# Altium PCB RN2483A.PcbDoc
Units mm, origin at the board's own origin, x right, y up, seen from the top; angles counter-clockwise.
Board outline 30.5 x 38.8 mm, 2 copper layers (Top Layer, Bottom Layer); 7 components, 7 nets, 77 pads, 127 vias.
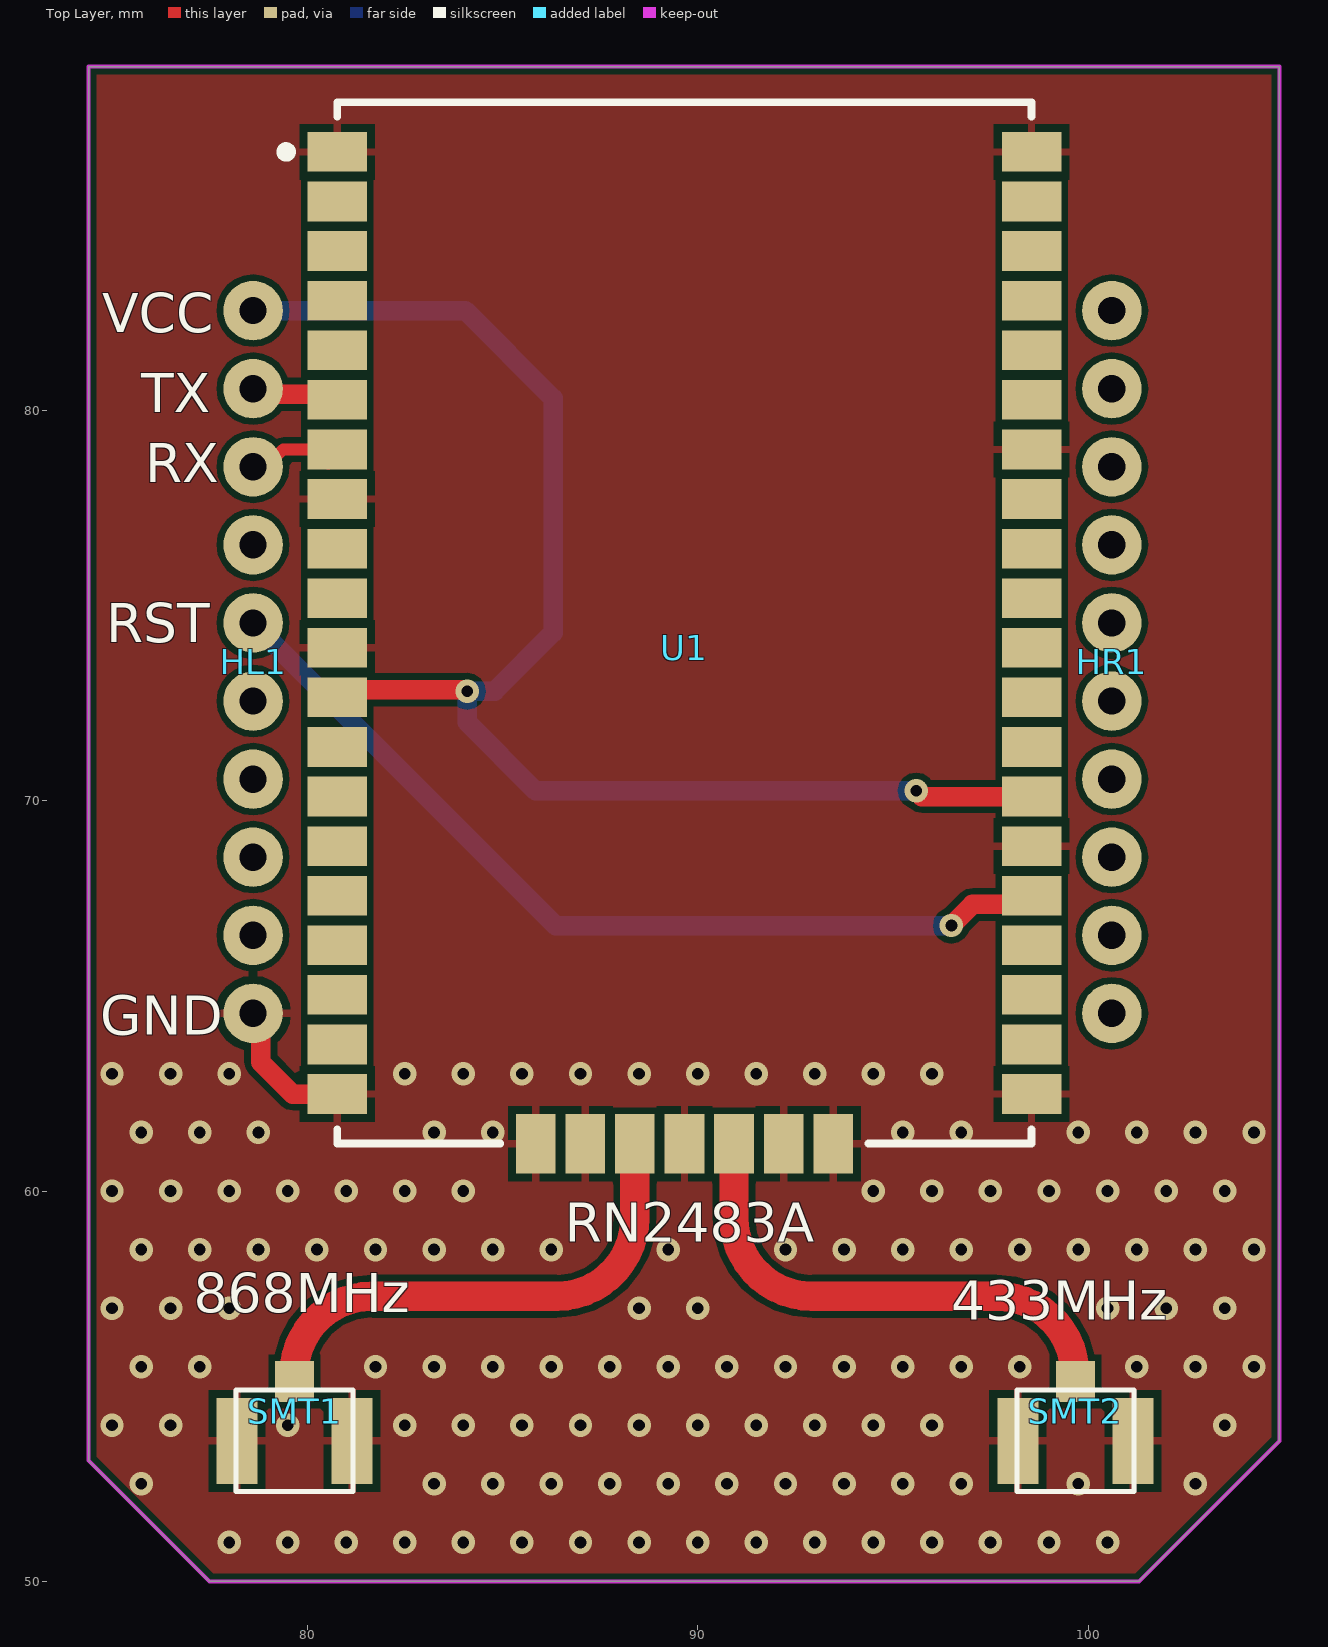
[diagram p0: Top Layer view]
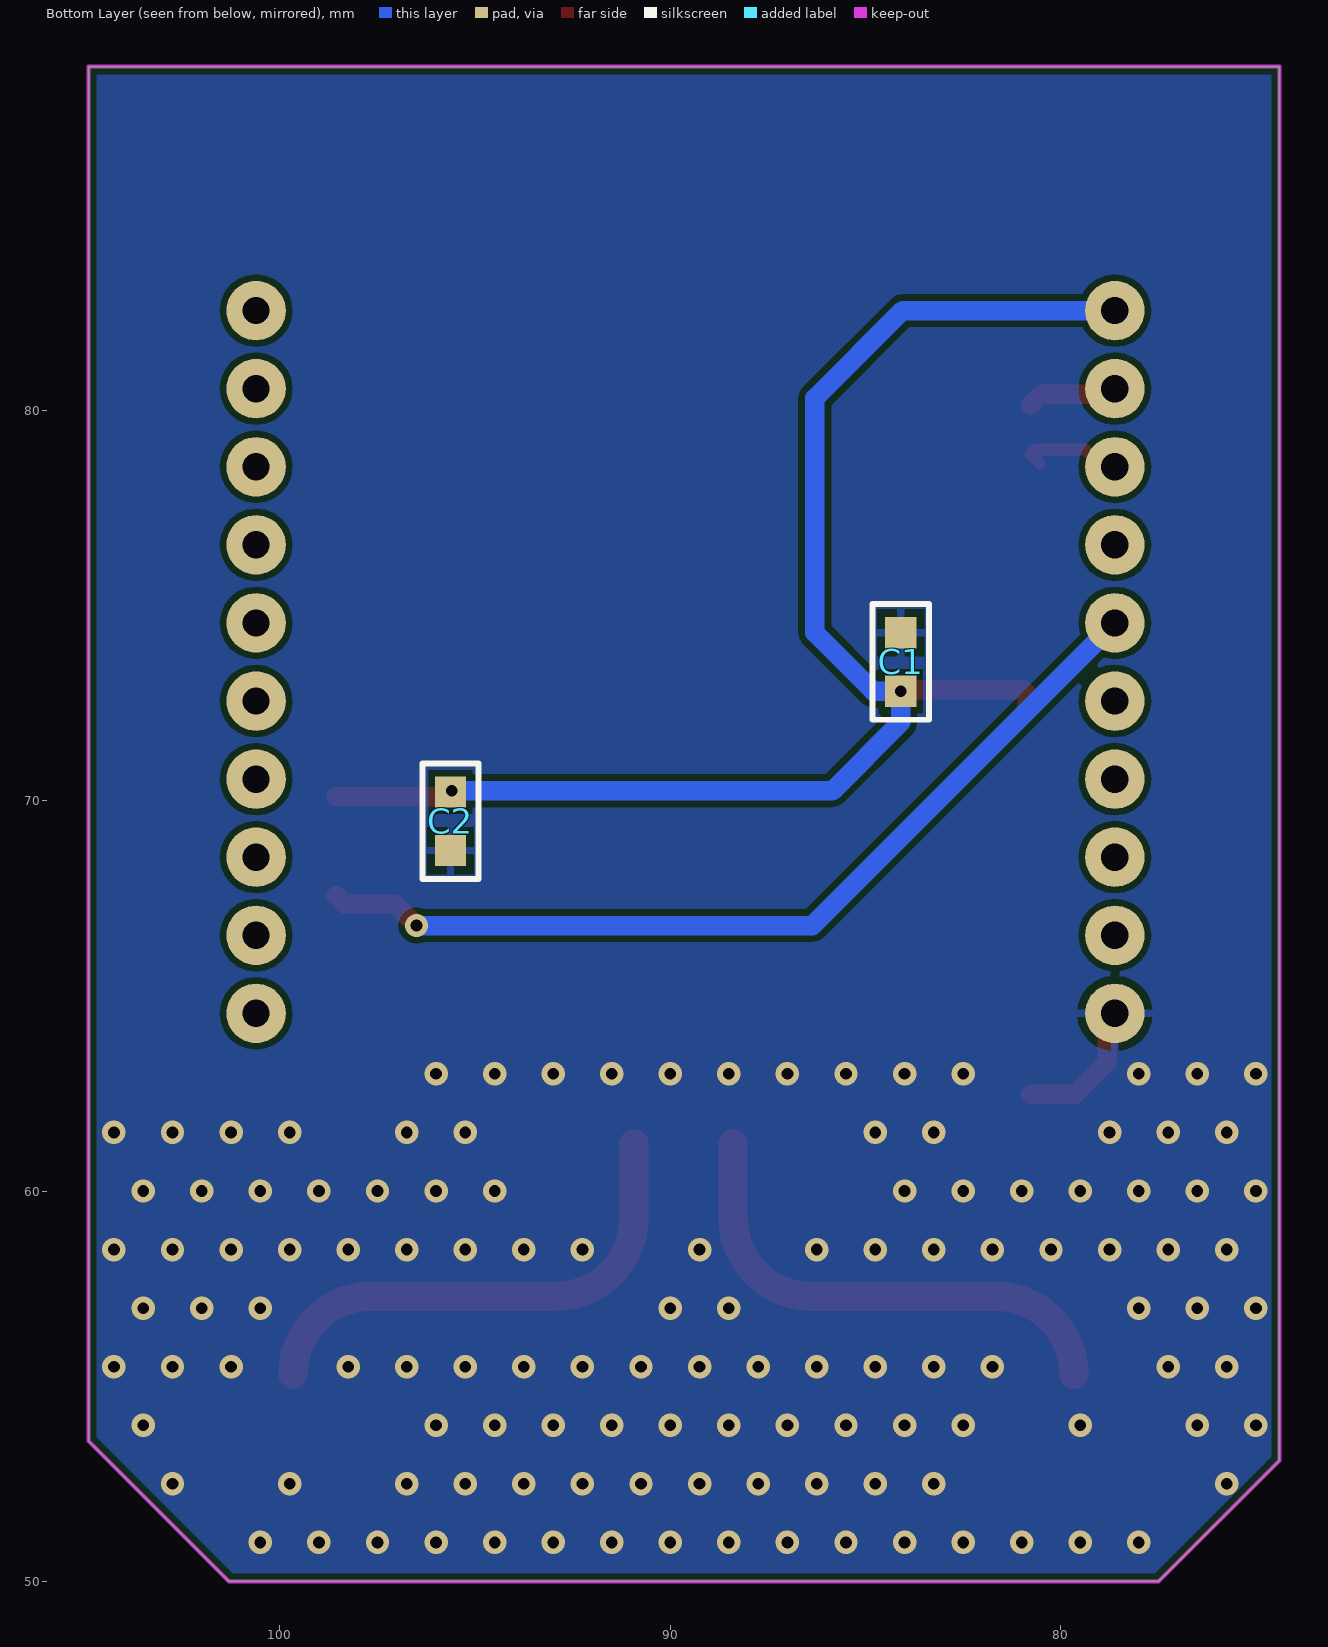
[diagram p1: Bottom Layer view, seen from below]

## Layer stack, top to bottom
Top Solder: solder mask 0.0102, Solder Resist, Dk 3.5
Top Layer: signal copper 0.0356
Dielectric 1: dielectric 0.32, FR-4, Dk 4.8
Bottom Layer: signal copper 0.0356
Bottom Solder: solder mask 0.0102, Solder Resist, Dk 3.5

## Board outline
74.4,53.1 77.5,50 101.3,50 104.9,53.6 104.9,88.8 74.4,88.8

## Design rules (kind name [scope] priority, off if disabled: settings)
Clearance [All] p1: gap=0.16 ignorepadtopadclearanceinfootprint=FALSE except(0: Arc-Text Arc-Hole Track-Text Track-Hole SMDPad-Text SMDPad-Hole THPad-Text THPad-Hole Via-Text Via-Hole Fill-Text Fill-Hole Poly-Text Poly-Hole Region-Text Region-Hole Text-Text Text-Hole)
DiffPairsRouting [All] p1: maxlimit=0.254 minlimit=0.254 mostfreqgap=0.254 toplayer_minwidth=0.16 toplayer_maxwidth=0.381 toplayer_prefwidth=0.2 bottomlayer_minwidth=0.16 bottomlayer_maxwidth=0.381 bottomlayer_prefwidth=0.2 maxuncoupledlength=12.7
Height [All] p1: minheight=0 maxheight=200 prefheight=12.7
HoleSize [All] p1: absolutevalues=TRUE maxlimit=6.35 minlimit=0.3 maxpercent=80.000 minpercent=20.000
MinimumSolderMaskSliver [All] p1: minsoldermaskwidth=0.1
PlaneClearance [All] p1: clearance=1
PlaneConnect [All] p1: planeconnectstyle=Relief reliefexpansion=0.508 reliefentries=4 reliefconductorwidth=1 reliefairgap=0.254
PolygonConnect PolygonConnect_1 [IsVia] p1: connectstyle=Direct reliefconductorwidth=0.254 reliefentries=4 polygonreliefangle="90 Angle" airgapwidth=0.254
PolygonConnect [All] p2: connectstyle=Relief reliefconductorwidth=0.2 reliefentries=4 polygonreliefangle="90 Angle" airgapwidth=0.2
RoutingVias [All] p1: holewidth=0.3 width=0.6 viastyle="Through Hole" minholewidth=0.3 minwidth=0.6 maxholewidth=6.35 maxwidth=10
SilkToSolderMaskClearance [IsPad] p1: minsilkscreentomaskgap=0.178 clearancetoexposedcopper=TRUE
SolderMaskExpansion [All] p1: expansion=0.102
Width [All] p1: maxlimit=5 minlimit=0.16 preferedwidth=0.25 minimp=50.000000 maximp=50.000000 favimp=50.000000
23 further rules are at their usual default settings.

## Components (designator, comment, footprint, x,y, rotation, side; value= is the part's Value field where it differs from the comment)
C1 "02016D104KAT2A" C0603 84.1,73.55 r270 bottom value=100nF
C2 "02016D104KAT2A" C0603 95.631,69.469 r90 bottom value=100nF
HL1 "Header1X10" HEADER1X10 78.613,82.55 r0 top
HR1 "Header1X10" HEADER1X10 100.609,82.55 r0 top
SMT1 "U.FL-R-SMT" *U.FL-R-SMT_U.FL-R-SMT(Primary) 79.675,53.6 r180 top
SMT2 "U.FL-R-SMT" *U.FL-R-SMT_U.FL-R-SMT(Primary) 99.675,53.6 r180 top
U1 "RN2483A-I/RM103" MCHP-MODULE-47_V 89.662,73.914 r0 top

## Footprints (in the part's own frame and the unit in brackets; to place one, negate y for a bottom-side part, rotate by r counter-clockwise, add the part's x,y. Pads: shape width x height; smd on the part's side, far side on the other; paste and mask are expansions set on the pad)
*U.FL-R-SMT_U.FL-R-SMT(Primary) [mm]
  rect 1x1.05 smd: P$1(0,-1.525)
  rect 1.05x2.2 smd: P$2(1.475,0) P$3(-1.475,0)
  silkscreen extent -1.5,-1.3 1.5,1.3
C0603 [mm]
  rect 0.8x0.8 smd: 1(-0.75,0) 2(0.75,0)
  silkscreen extent -1.48,-0.72 1.48,0.72, body extent -0.8,-0.4 0.8,0.4, height 0.8
HEADER1X10 [mil]
  round 60 hole 27.56: 1(0,0) 2(0,-78.74) 3(0,-157.48) 4(0,-236.22) 5(0,-314.96) 6(0,-393.7) 7(0,-472.44) 8(0,-551.18) 9(0,-629.92) 10(0,-708.66)
MCHP-MODULE-47_V [mil] "SMD, 47-Leads, Body 26.67x17.78mm, Pitch 1.27mm"
  rect 60x40 smd mask+7.87: 1(-350,500) 2(-350,450) 3(-350,400) 4(-350,350) 5(-350,300) 6(-350,250) 7(-350,200) 8(-350,150) 9(-350,100) 10(-350,50) 11(-350,0) 12(-350,-50) 13(-350,-100) 14(-350,-150) 15(-350,-200) 16(-350,-250) 17(-350,-300) 18(-350,-350) 19(-350,-400) 20(-350,-450) 28(350,-450) 29(350,-400) 30(350,-350) 31(350,-300) 32(350,-250) 33(350,-200) 34(350,-150) 35(350,-100) 36(350,-50) 37(350,0) 38(350,50) 39(350,100) 40(350,150) 41(350,200) 42(350,250) 43(350,300) 44(350,350) 45(350,400) 46(350,450) 47(350,500)
  rect 40x60 smd mask+7.87: 21(-150,-500) 22(-100,-500) 23(-50,-500) 24(0,-500) 25(50,-500) 26(100,-500) 27(150,-500)
  silkscreen extent -407,-500 350,550, body extent -350,-500 350,550, height 131

## Part data
C1 C2: "C0603"
SMT1 SMT2: Package=None, Availability=Unavailable, MF="Hirose Electric", MP=U.FL-R-SMT, Price=None, SnapEDA_Link=https://www.snapeda.com/parts/U.FL-R-SMT/Hirose%20Electric%20Co%20Ltd/view-part/?ref=snap
U1: library part CMP-2000-07478-1, "Low-Power Long Range LoRa(R) Technology Transceiver Module, 2.1 to 3.6 V, -40 to 85 degC, 47-Pin SMD, RoHS, Tray", Manufacturer=Microchip, Package Description="47-Pin Surface Mount Device, Body 26.67 x 17.78 mm, Pitch 1.27 mm", Package Reference=MODULE-47, Datasheet URL=http://www.microchip.com/mymicrochip/filehandler.aspx?ddocname=en574289, Datasheet Version="Rev. C, 04/2017", Manufacturer URL=http://www.microchip.com/, Mounting Technology=SurfaceMount, RoHSCompliant=false

## Via types
v1: diameter 0.6, hole 0.3, Top Layer to Bottom Layer, tented both sides, 127 vias

## Nets (pads, with @x,y where several pads share a name; then routed paths per layer and width w, separated by ;. In a path a pad name is that pad's centre, name@x,y a point inside that pad or via, vN(x,y) a via of type N, cw(c..) or ccw(c..) an arc to the next point about the centre after c; other vN are vias at no path point)
GND: C1.1 C2.1 HL1.10 SMT1.P$2 SMT1.P$3 SMT2.P$2 SMT2.P$3 U1.1 U1.8 U1.11 U1.20 U1.21 U1.22 U1.24 U1.26 U1.27 U1.28 U1.33 U1.41 U1.47 | length 3.6
  Top Layer w0.5: HL1.10 78.809,64.354 78.809,63.304 79.629,62.484 U1.20
  other v1: 78,51 79.5,51 81,51 82.5,51 84,51 85.5,51 87,51 88.5,51 90,51 91.5,51 93,51 94.5,51 96,51 97.5,51 99,51 100.5,51 75.75,52.5 83.25,52.5 84.75,52.5 86.25,52.5 87.75,52.5 89.25,52.5 90.75,52.5 92.25,52.5 93.75,52.5 95.25,52.5 96.75,52.5 99.75,52.5 102.75,52.5 75,54 76.5,54 79.5,54 82.5,54 84,54 85.5,54 87,54 88.5,54 90,54 91.5,54 93,54 94.5,54 96,54 103.5,54 75.75,55.5 77.25,55.5 81.75,55.5 83.25,55.5 84.75,55.5 86.25,55.5 87.75,55.5 89.25,55.5 90.75,55.5 92.25,55.5 93.75,55.5 95.25,55.5 96.75,55.5 98.25,55.5 101.25,55.5 102.75,55.5 104.25,55.5 75,57 76.5,57 78,57 88.5,57 90,57 100.5,57 102,57 103.5,57 75.75,58.5 77.25,58.5 78.75,58.5 80.25,58.5 81.75,58.5 83.25,58.5 84.75,58.5 86.25,58.5 89.25,58.5 92.25,58.5 93.75,58.5 95.25,58.5 96.75,58.5 98.25,58.5 99.75,58.5 101.25,58.5 102.75,58.5 104.25,58.5 75,60 76.5,60 78,60 79.5,60 81,60 82.5,60 84,60 94.5,60 96,60 97.5,60 99,60 100.5,60 102,60 103.5,60 75.75,61.5 77.25,61.5 78.75,61.5 83.25,61.5 84.75,61.5 95.25,61.5 96.75,61.5 99.75,61.5 101.25,61.5 102.75,61.5 104.25,61.5 75,63 76.5,63 78,63 82.5,63 84,63 85.5,63 87,63 88.5,63 90,63 91.5,63 93,63 94.5,63 96,63
R\E\S\E\T\: HL1.5 U1.32 | length 23.5
  Top Layer w0.5: v1(96.5,66.8) 97.04,67.34 98.328,67.34 U1.32
  Bottom Layer w0.5: HL1.5 86.363,66.8 v1(96.5,66.8)
RFH: SMT1.P$1 U1.23 | length 12.9
  Top Layer w0.75: SMT1.P$1@79.662,55.304 cw(c81.662,55.304) 81.662,57.304 86.392,57.304 ccw(c86.392,59.304) 88.392,59.304 U1.23
RFL: SMT2.P$1 U1.25 | length 12.9
  Top Layer w0.75: U1.25 90.932,59.304 ccw(c92.932,59.304) 92.932,57.304 97.662,57.304 cw(c97.662,55.304) SMT2.P$1@99.662,55.304
UART_RX: HL1.3 U1.7 U1.30 | length 2.8
  Top Layer w0.3: HL1.3@78.699,78.636 HL1.3 78.944,78.55 79.388,78.994 80.645,78.994 80.772,78.867 U1.7@80.541,78.636
UART_TX: HL1.2 U1.6 U1.31 | length 2.3
  Top Layer w0.5: HL1.2 78.756,80.407 80.502,80.407 U1.6@80.772,80.137
VCC: C1.2 C2.2 HL1.1 U1.12 U1.34 | length 37.2
  Top Layer w0.5: U1.12@80.864,72.458 80.725,72.597 U1.12 80.965,72.837 84.063,72.837 cw(c84.063,72.8) v1(84.1,72.8) ; v1(95.6,70.25) 95.746,70.104 U1.34
  Bottom Layer w0.5: HL1.1 84.05,82.55 86.3,80.3 86.3,74.3 84.8,72.8 v1(84.1,72.8) 84.1,72 85.85,70.25 v1(95.6,70.25)
pads on no net: HL1.4 HL1.6 HL1.7 HL1.8 HL1.9 HR1.1 HR1.2 HR1.3 HR1.4 HR1.5 HR1.6 HR1.7 HR1.8 HR1.9 HR1.10 U1.2 U1.3 U1.4 U1.5 U1.9 U1.10 U1.13 U1.14 U1.15 U1.16 U1.17 U1.18 U1.19 U1.29 U1.35 U1.36 U1.37 U1.38 U1.39 U1.40 U1.42 U1.43 U1.44 U1.45 U1.46
copper on no net: | length 0.9
  Top Layer w0.5: 78.613,72.55 78.66,72.597 ; 100.332,64.55 100.609,64.55 100.436,64.724 ; 100.481,66.422 100.609,66.55
  Bottom Layer w0.5: 78.613,72.55 78.687,72.476

## Polygon pours and split planes (outlines as drawn)
GND on Bottom Layer "Bottom Layer-GND" (solid, pour order 4): 74.4,88.8 104.9,88.8 104.9,53.6 104.8,53.6 101.2,50 77.5,50 74.4,53.1
GND on Top Layer "Top Layer-GND" (solid, pour order 2): 74.4,88.8 104.9,88.8 104.9,53.6 101.3,50 77.5,50 74.4,53.1

## Keep-outs
Keep-Out Layer:
  the board outline again, w0.1

## Silkscreen, mask and mechanical layers (free items; w line width, h text height)
Top Overlay:
  text "VCC" at 74.75,82 h1
  text "TX" at 75.75,79.95 h1
  text "RX" at 75.85,78.15 h1
  text "RST" at 74.85,74.05 h1
  text "GND" at 74.7,64 h1
  text "RN2483A" at 86.6,58.7 h1
  text "868MHz" at 77.1,56.9 h1
  text "433MHz" at 96.5,56.7 h1
Mechanical 1:
  the board outline again, w0.2